# Altium PCB full_routing.PcbDoc
Units mil, origin at the board's own origin, x right, y up, seen from the top; angles counter-clockwise.
Board outline 6000 x 4000 mil, 2 copper layers (Top Layer, Bottom Layer); 6 components, 6 nets, 53 pads, 0 vias.
Unrouted connection lines stored in the file: 7.
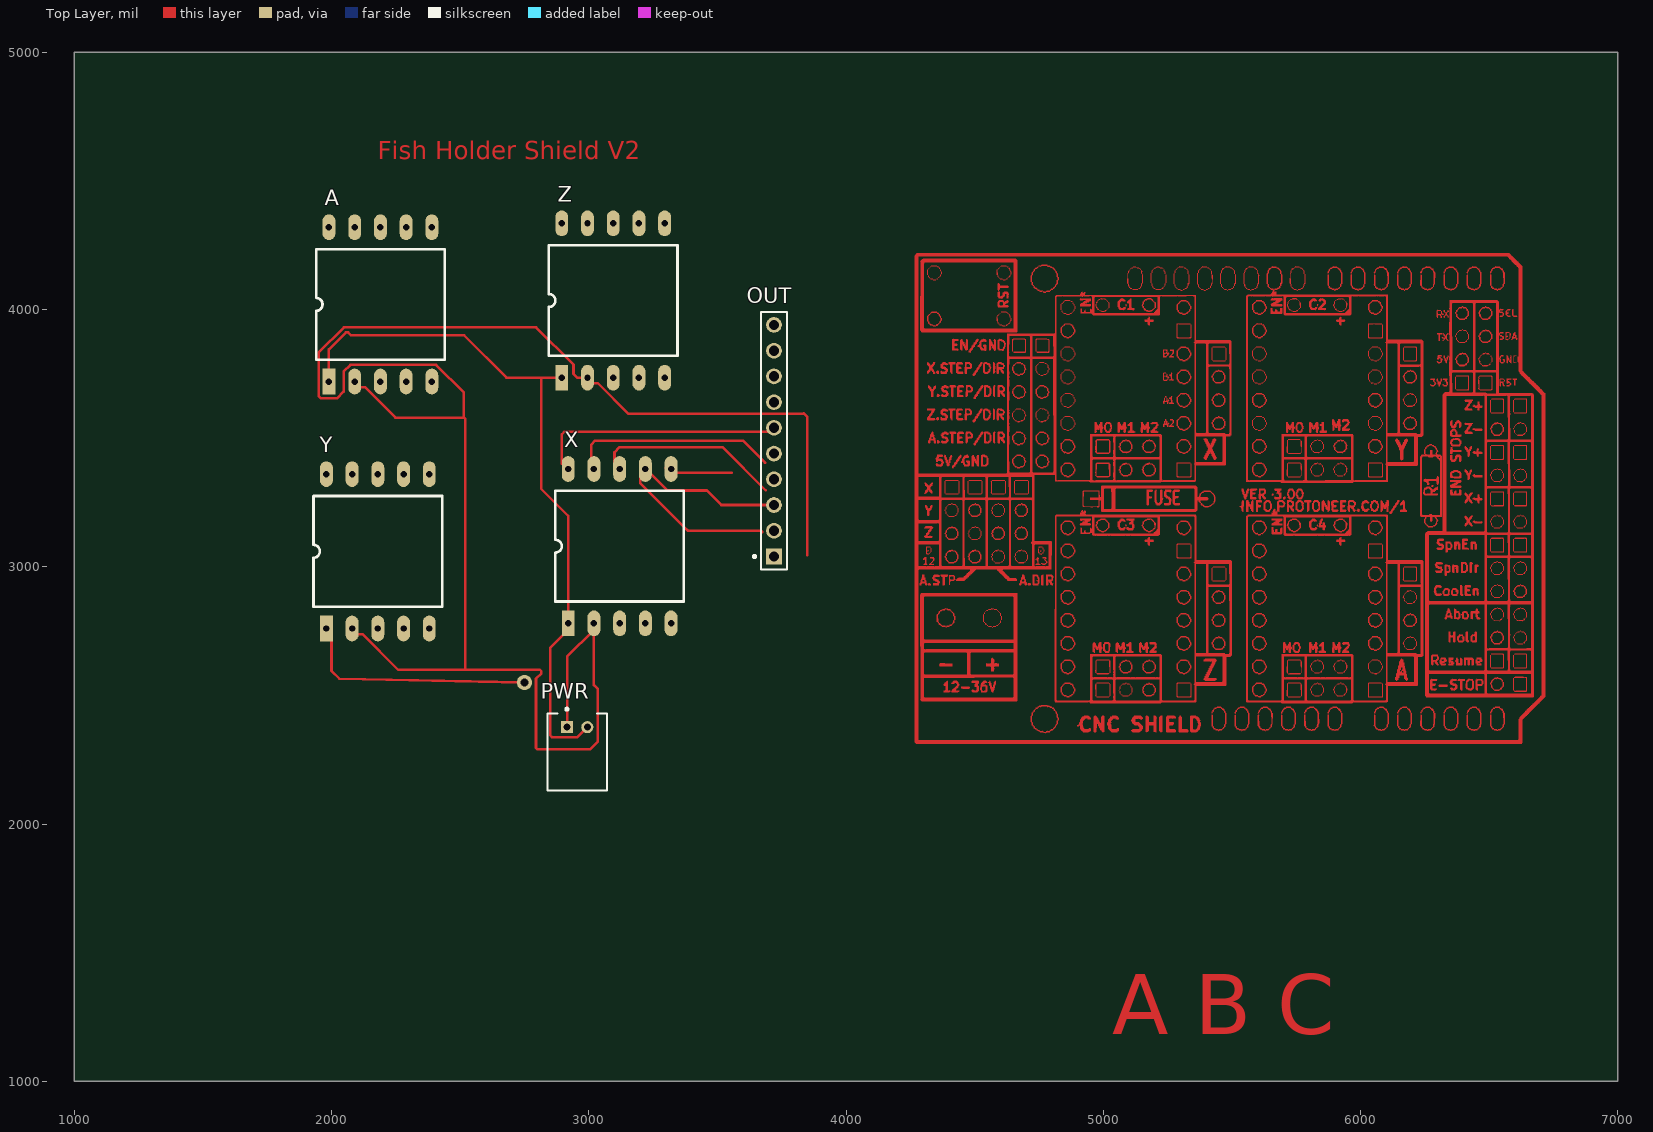
[diagram p0: Top Layer view]
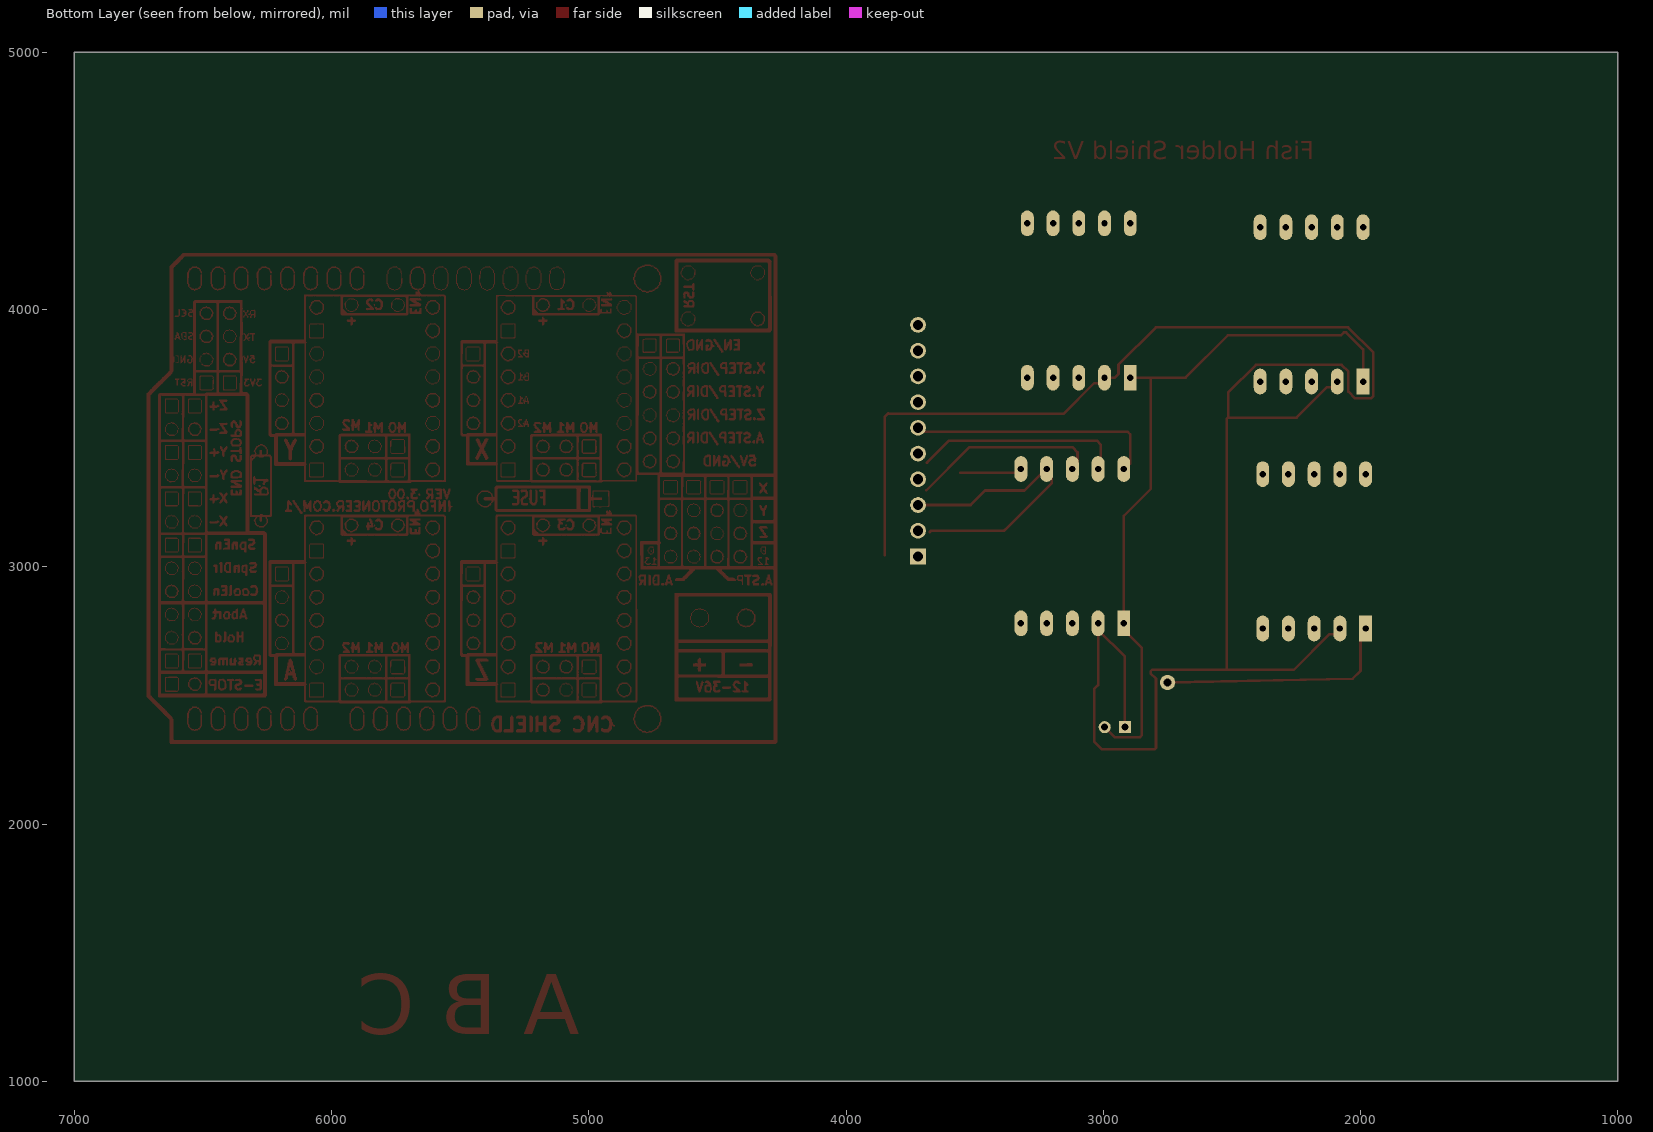
[diagram p1: Bottom Layer view, seen from below]

## Layer stack, top to bottom
Top Solder: solder mask 0.4, Solder Resist, Dk 3.5
Top Layer: signal copper 1.4
Dielectric 1: dielectric 12.6, FR-4, Dk 4.8
Bottom Layer: signal copper 1.4
Bottom Solder: solder mask 0.4, Solder Resist, Dk 3.5

## Board outline
1000,1000 7000,1000 7000,5000 1000,5000

## Design rules (kind name [scope] priority, off if disabled: settings)
Clearance [All] p1: gap=10 ignorepadtopadclearanceinfootprint=FALSE
PolygonConnect [All] p1: connectstyle=Relief reliefconductorwidth=10 reliefentries=4 polygonreliefangle="90 Angle" airgapwidth=10
RoutingVias [All] p1: holewidth=28 width=50 viastyle="Through Hole" minholewidth=28 minwidth=50 maxholewidth=28 maxwidth=50
SolderMaskExpansion [All] p1: expansion=4 istentingtop=FALSE
Width [All] p1: maxlimit=10 minlimit=10 preferedwidth=10
30 further rules are at their usual default settings.

## Components (designator, comment, footprint, x,y, rotation, side; value= is the part's Value field where it differs from the comment)
A "MCONT" MCONT 1990,3720 r90 top
OUT "929850-01-10-RA" 3M-929850-01-10-RA_V 3720,3490 r90 top
PWR "S2B-PH-K-S(LF)(SN)" JST-S2B-PH-K-S_V 2955,2280 r0 top
X "MCONT" MCONT 2920,2780 r90 top
Y "MCONT" MCONT 1980,2760 r90 top
Z "MCONT" MCONT 2895,3735 r90 top

## Footprints (in the part's own frame and the unit in brackets; to place one, negate y for a bottom-side part, rotate by r counter-clockwise, add the part's x,y. Pads: shape width x height; smd on the part's side, far side on the other; paste and mask are expansions set on the pad)
3M-929850-01-10-RA_V [mm] "THD, 10-Leads, Body 25.4x2.54mm, Pitch 2.54mm"
  rect 1.55x1.55 hole 1.02: 1(-11.43,0)
  round 1.55 hole 1.02: 2(-8.89,0) 3(-6.35,0) 4(-3.81,0) 5(-1.27,0) 6(1.27,0) 7(3.81,0) 8(6.35,0) 9(8.89,0) 10(11.43,0)
  silkscreen extent -12.7,-1.27 12.7,2.04, body extent -12.7,-1.27 12.7,1.27, height 8.26
JST-S2B-PH-K-S_V [mm] "THD, 2-Leads, Body 7.6x5.9mm, Pitch 2mm"
  rect 1.2x1.2 hole 0.7: 1(-1,2.45)
  round 1.2 hole 0.7: 2(1,2.45)
  silkscreen extent -2.95,-3.8 2.95,4.35, body extent -2.95,-3.8 2.95,3.8, height 4.8
MCONT [mil]
  rect 100x50 hole 25: 1(0,0)
  oval 100x50 hole 25: 2(0,-100) 3(0,-200) 4(0,-300) 5(0,-400) 6(600,-400) 7(600,-300) 8(600,-200) 9(600,-100) 10(600,0)
  silkscreen extent 85,-450 515,50

## Part data
OUT: library part CMP-002-00023-2, "Female Header, Pitch 2.54 mm, 1 x 10 Position, Height 8.26 mm, Tail Length 3.18 mm, -40 to 105 degC, RoHS, Bulk", Colour=Black, Current Rating=1A, Manufacturer=3M, Max Operating Temperature=105°C, Min Operating Temperature=-40°C, Package Description="Female Header, Pitch 2.54 mm, 1 x 10 Position, Height 8.26 mm, Tail Length 3.18 mm", Package Quantity=300, Case/Package=929850-01-10-RA, Connector Type=Header, Contact Finish=Gold, Contact Gender=Female, Contact Material=Copper, Contact Plating=Gold, Datasheet URL=http://multimedia.3m.com/mws/media/22500O/3mtm-boardmount-skt-100-100x-100strt-sldr-tails-ts0815.pdf, Datasheet Version=Jun-13, Gender=Female, Lead Pitch=2.54mm, Manufacturer URL=http://www.3m.com/, Mounting Technology=TH, Package Reference=929850-01-10-RA, Packaging=Bulk, Pins=10, RoHS Compliant=True
PWR: library part CMP-002-00030-2, "Male Header, Pitch 2 mm, 1 x 2 Position, Height 4.8 mm, Tail Length 3.4 mm, -25 to 85 degC, RoHS, Bulk", Case/Package=S2B-PH-K-S, Manufacturer="Japan Solderless Terminals", Max Operating Temperature=85°C, Min Operating Temperature=-25°C, Package Description="Male Header, Pitch 2 mm, 1 x 2 Position, Height 4.8 mm, Tail Length 3.4 mm", Connector Type=Header, Datasheet URL=http://www.jst-mfg.com/product/pdf/eng/ePH.pdf, Datasheet Version=Dec-12, Gender=Male, Mounting Technology=SM, Package Reference=S2B-PH-K-S, RoHS Compliant=Unknown

## Free pads (board coordinates)
  round 60 hole 30: 9(2750,2550)

## Nets (pads, with @x,y where several pads share a name; then routed paths per layer and width w, separated by ;. In a path a pad name is that pad's centre, name@x,y a point inside that pad or via, vN(x,y) a via of type N, cw(c..) or ccw(c..) an arc to the next point about the centre after c; other vN are vias at no path point)
GND: A.1 PWR.2 X.1 X.6 Y.1 Z.1 | length 3020.8
  Top Layer w10: A.1 1990,3845 2055.86,3910.86 2064.14,3910.86 2075,3900 2515,3900 2680,3735 2815,3735 ; Z.1 2815,3735 ; PWR.2 2955.75,2337.83 2857.17,2337.83 2850,2345 2850,2450 2850,2685 2920,2755 X.1 2920,3198.33 2815,3303.33 2815,3735 ; X.6@3300,3385 3300,3383.48 3318.48,3365 3555.64,3365
NetOUT_1: OUT.1 X.10
NetOUT_2: OUT.2 X.9
NetOUT_4: OUT.4 X.8
NetOUT_5: OUT.5 X.7 | length 613.6
  Top Layer w10: X.7@3200,3385 3200,3325 3382.07,3142.93 3385,3140 3669.54,3140 3672.47,3137.07 3674.79,3134.75
VCC: A.2 OUT.10 PWR.1 X.2 Y.2 Z.2 | length 7347.9
  Top Layer w10: Y.2 2080,2756.91 2098.48,2738.43 2120,2738.43 2258.79,2599.64 2515,2599.64 ; A.2 2090,3716.91 2108.48,3698.43 2130,3698.43 2248.43,3580 2514.14,3580 ; PWR.1 2915.63,2650.63 X.2@3020,2755 ; X.2 X.2@3020,2755 ; 3850,3045.86 3850,3581.72 3835.86,3595.86 3834.49,3594.49 3153.94,3594.49 3035,3713.43 3013.48,3713.43 2995,3731.91 Z.2 2955,3735 2940.61,3749.39 2940.61,3785.61 2795.36,3930.86 2047.57,3930.86 1950,3833.28 1950,3663.79 1958.79,3655 2021.21,3655 2047.32,3681.11 2047.32,3758.89 2073.43,3785 2406.57,3785 2514.14,3677.43 2514.14,3580 ; 2514.14,3580 2520,3574.14 2520,2604.64 2515,2599.64 ; 2515,2599.64 2809.64,2599.64 2815.5,2593.78 2815.5,2585.5 2795,2565 2795,2295.86 2800.86,2290 3005,2290 3035,2320 3035,2524.59 3020,2539.59 X.2@3020,2755
pads on no net: A.3 A.4 A.5 A.6 A.7 A.8 A.9 A.10 OUT.3 OUT.6 OUT.7 OUT.8 OUT.9 X.3 X.4 X.5 Y.3 Y.4 Y.5 Y.6 Y.7 Y.8 Y.9 Y.10 Z.3 Z.4 Z.5 Z.6 Z.7 Z.8 Z.9 Z.10
copper on no net: | length 3966
  Top Layer w10: 2000,2785 2000,2595 2030,2565 2750,2550 ; 2895,3400 2895,3515 2905,3525 3710,3525 ; 3010,3390 3010,3475 3025,3490 3600,3490 3685,3405 ; 3100,3385 3100,3445 3120,3465 3520,3465 3687.5,3297.5 ; 3240,3385 3240,3380 3240,3363.43 3306.83,3296.6 3458.81,3296.6 3515.41,3240 3720,3240

## Other copper
Top Layer:
  drawing of 580 lines, arcs and shapes, not listed
  text "Fish Holder Shield V2" at 2180.11,4560.78 h120
  text "A B C" at 5034.45,1105 h400